# Altium PCB NEW_PCB.pcbdoc
Units mil, origin at the board's own origin, x right, y up, seen from the top; angles counter-clockwise.
Board outline 1948.8 x 1811 mil, 2 copper layers (Top Layer, Bottom Layer); 48 components, 54 nets, 170 pads, 44 vias.
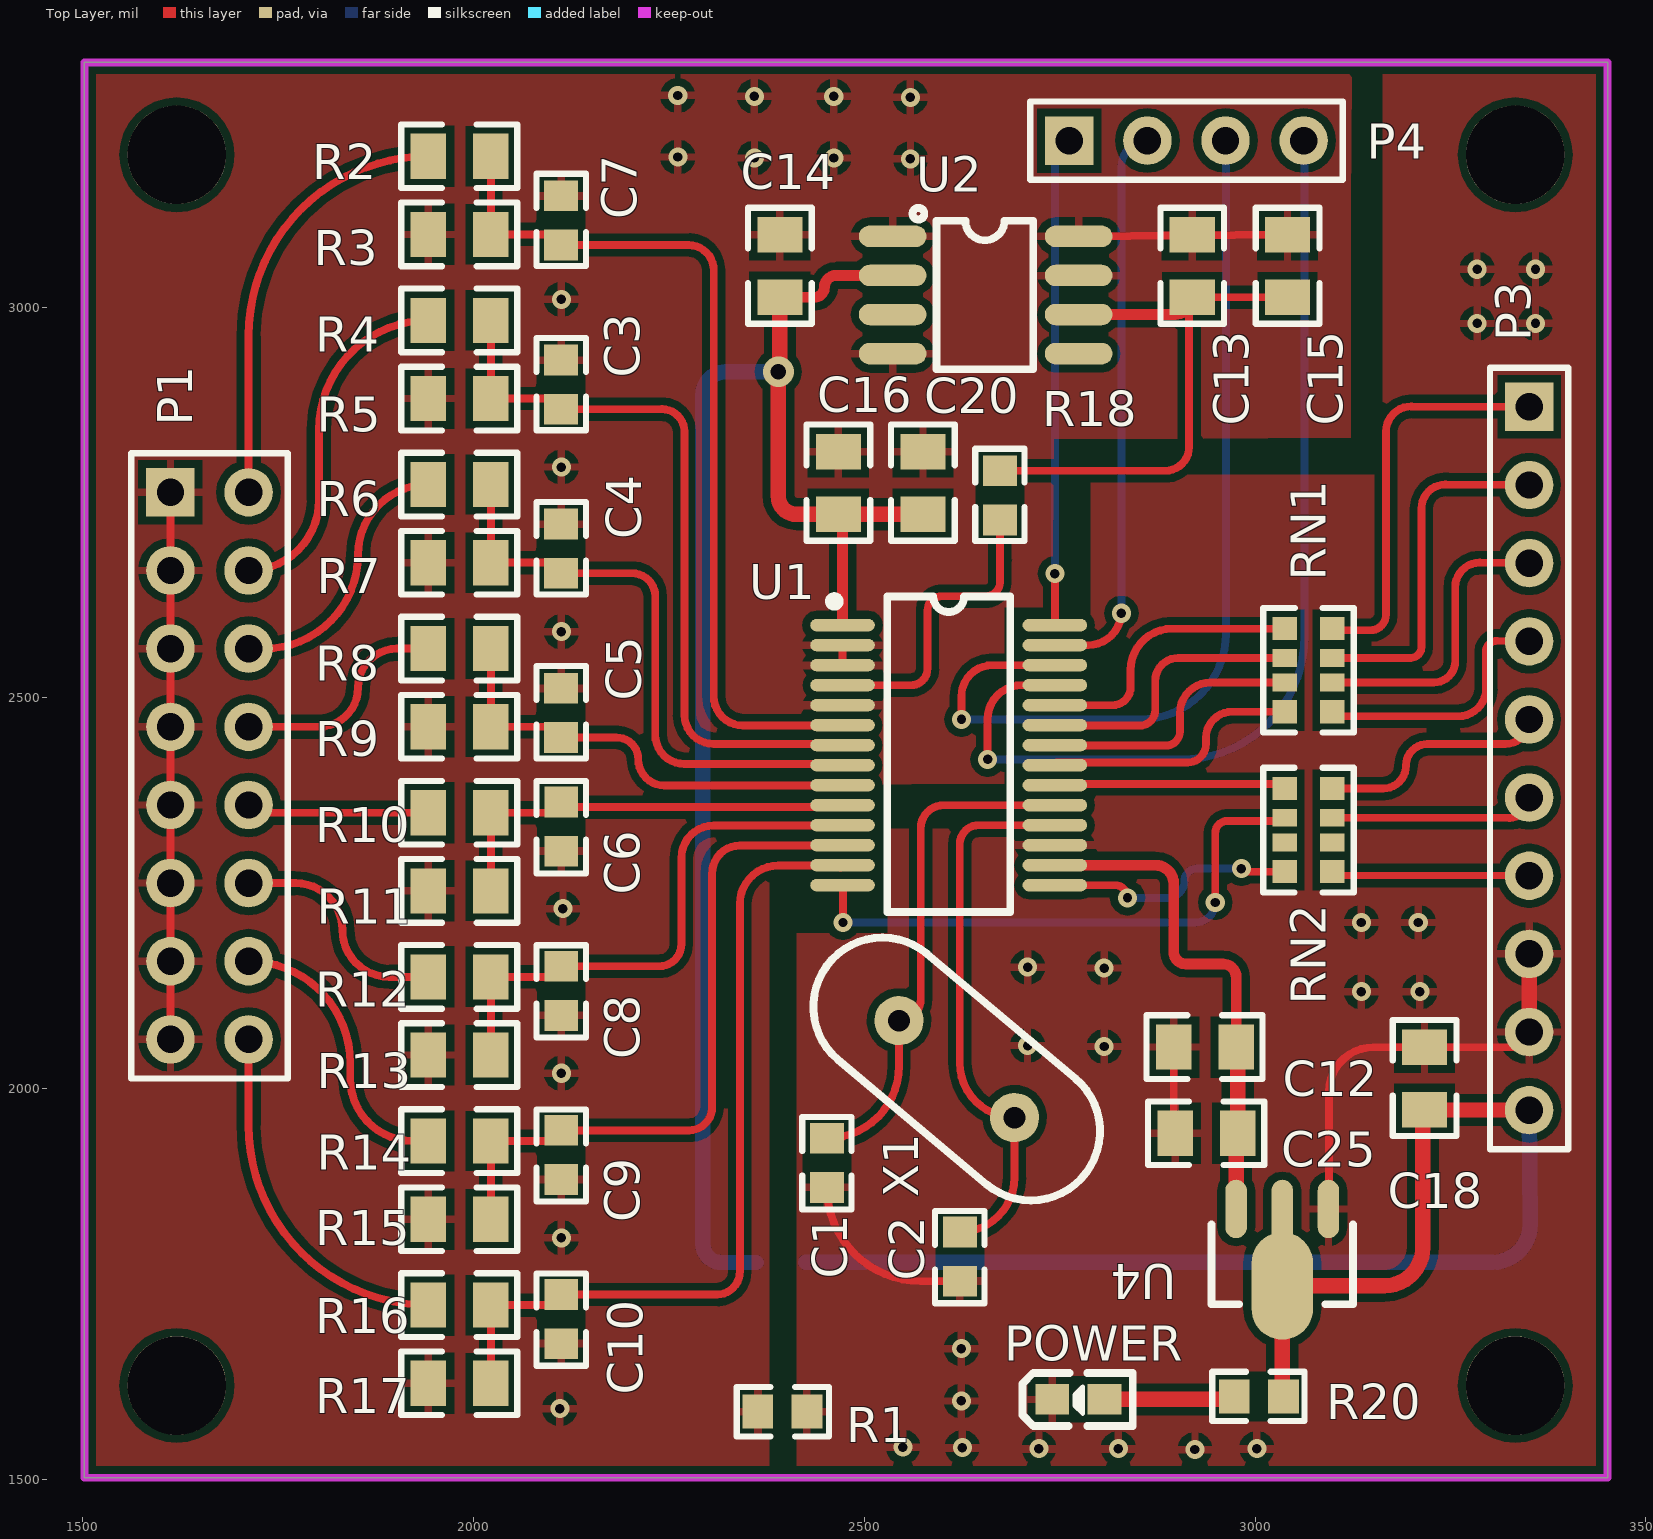
[diagram p0: Top Layer view]
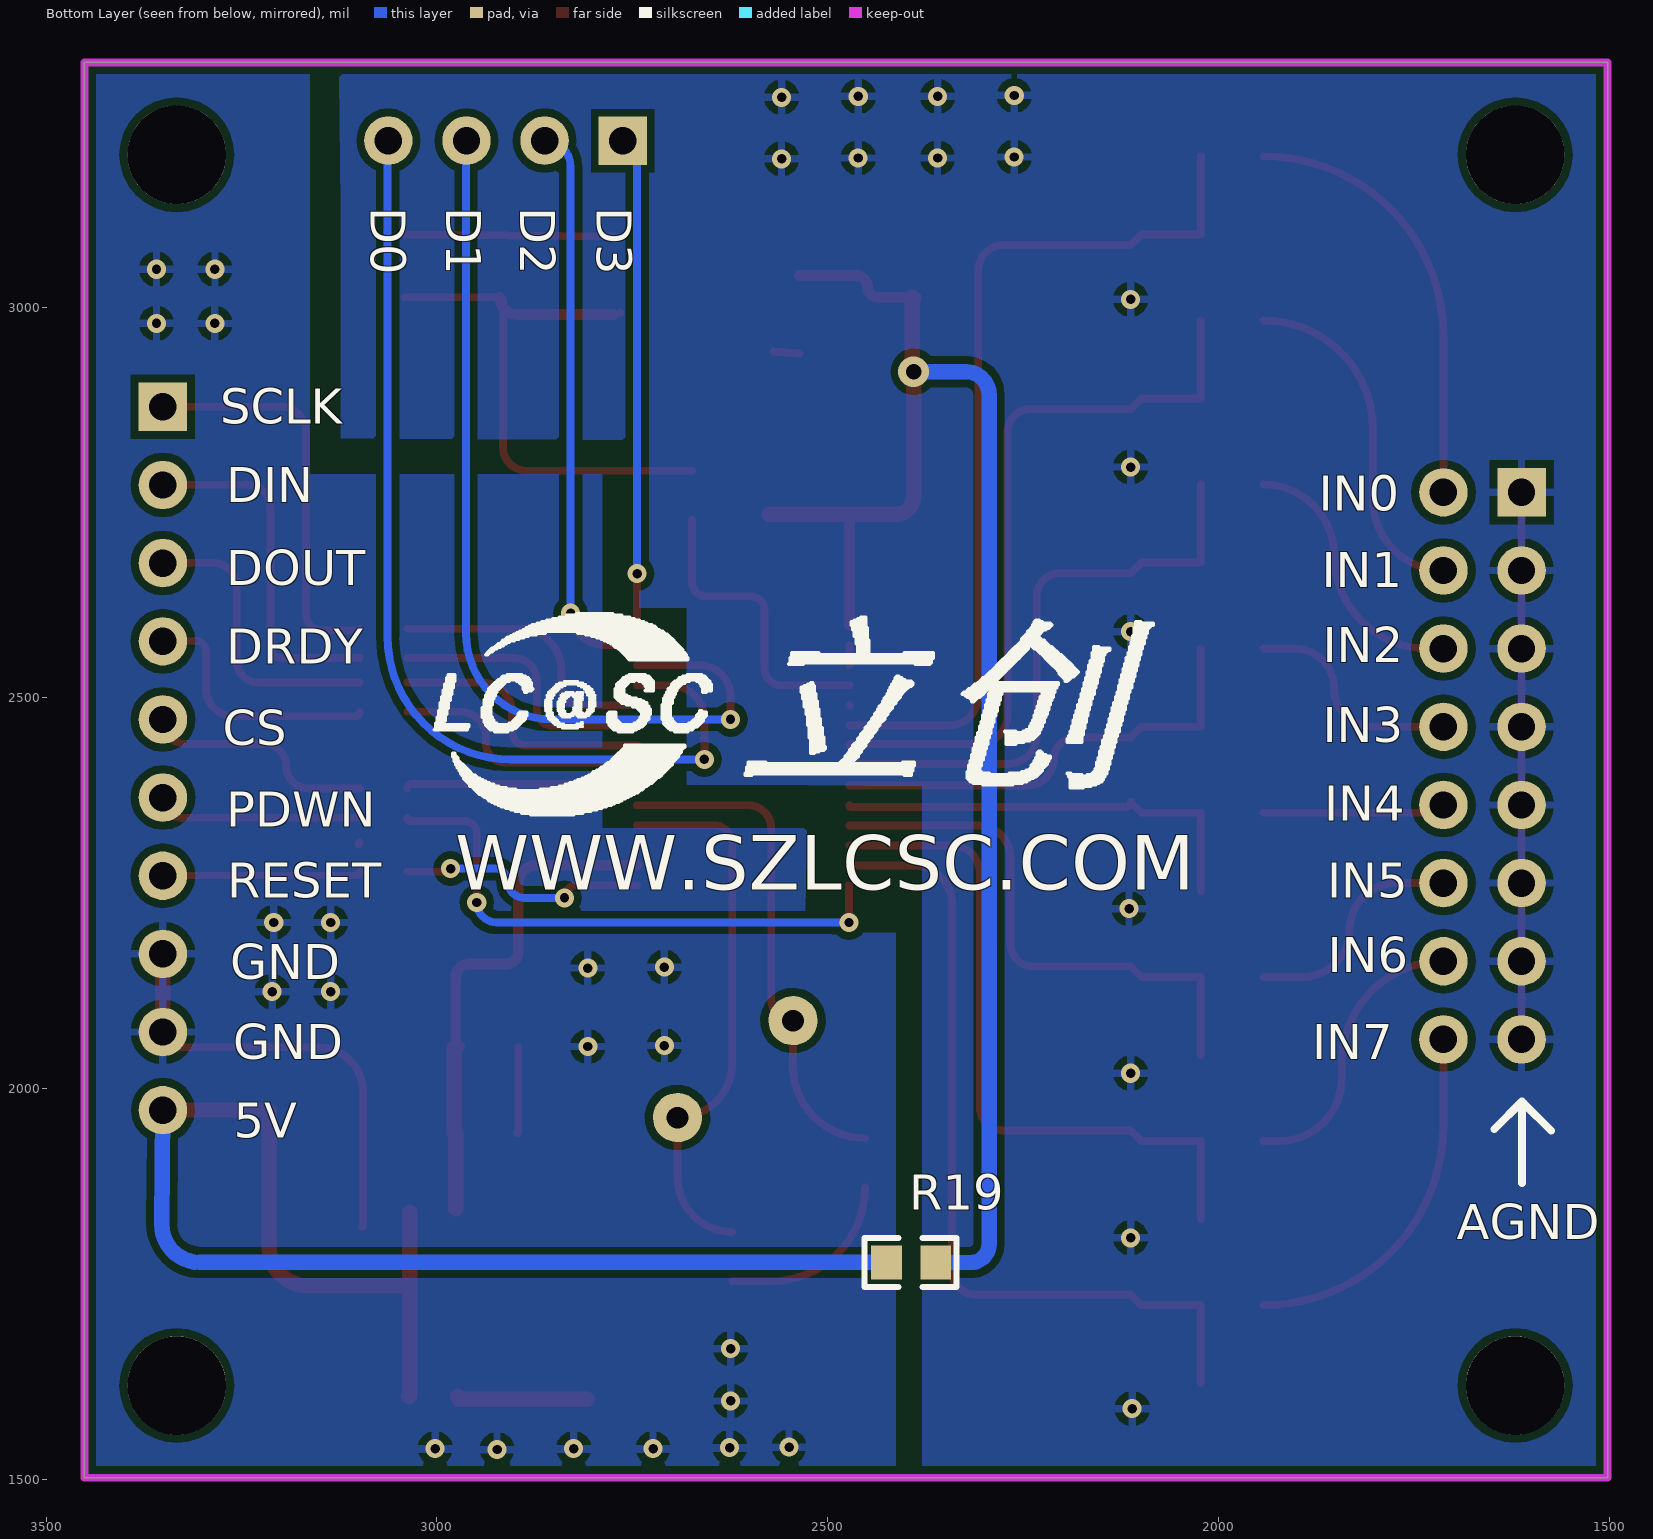
[diagram p1: Bottom Layer view, seen from below]

## Layer stack, top to bottom
Top Solder: solder mask 0.4, Solder Resist, Dk 3.5
Top Layer: signal copper 1.4
Dielectric1: dielectric 12.6, FR-4, Dk 4.8
Bottom Layer: signal copper 1.4
Bottom Solder: solder mask 0.4, Solder Resist, Dk 3.5

## Board outline
1502,1502 3450.8,1502 3450.8,3313 1502,3313

## Design rules (kind name [scope] priority, off if disabled: settings)
Clearance [All] p1: gap=10
PolygonConnect [All] p1: connectstyle=Relief reliefconductorwidth=10 reliefentries=4 polygonreliefangle="90 Angle" airgapwidth=10
RoutingVias [All] p1: holewidth=28 width=50 viastyle="Through Hole" minholewidth=28 minwidth=50 maxholewidth=28 maxwidth=50
SolderMaskExpansion [All] p1: expansion=4
Width [All] p1: maxlimit=10 minlimit=10 preferedwidth=10
30 further rules are at their usual default settings.

## Components (designator, comment, footprint, x,y, rotation, side; value= is the part's Value field where it differs from the comment)
C1 "18pF" ?#1 2452,1873 r90 top
C2 "18pF" ?#1 2622,1753 r90 top
C3 "1nF(102)" ?#1 2112,2933 r270 top
C4 "1nF(102)" ?#1 2112,2723 r270 top
C5 "1nF(102)" ?#1 2112,2513 r270 top
C6 "1nF(102)" ?#1 2112,2303 r90 top
C7 "1nF(102)" ?#1 2112,3143 r270 top
C8 "1nF(102)" ?#1 2112,2093 r90 top
C9 "1nF(102)" ?#1 2112,1883 r90 top
C10 "1nF(102)" ?#1 2112,1673 r90 top
C12 "4.7uF" ?#2 2895.7,2053.16 r0 top
C13 "100nF(104)" ?#2 2919.32,3092.53 r270 top
C14 "4.7uF" ?#2 2391.8,3092.5 r270 top
C15 "4.7uF" ?#2 3041.37,3092.53 r270 top
C16 "100nF(104)" ?#2 2466.65,2814.91 r270 top
C18 "4.7uF" ?#2 3216.6,2053.1 r270 top
C20 "22uF" ?#2 2574.83,2814.97 r270 top
C25 "100nF(104)" ?#2 2897.67,1942.92 r0 top
P1 "2*8Headers" ?#3 1612,2763 r270 top
P3 "Headers  Pins2.54mm1*10P" ?#4 3350.5,2472.39 r270 top
P4 "Headers  Pins 1*4P" ?#5 2862,3213 r0 top
POWER "0603 Green 509-620mcd" ?#6 2807.2,1602.31 r180 top
R1 "0Ω" ?#1 2427.2,1586.62 r180 top
R2 "100Ω" ?#2 1942,3193 r0 top
R3 "10KΩ" ?#2 1942,3093 r0 top
R4 "100Ω" ?#2 1942,2983 r0 top
R5 "10KΩ" ?#2 1942,2883 r0 top
R6 "100Ω" ?#2 1942,2773 r0 top
R7 "10KΩ" ?#2 1942,2673 r0 top
R8 "100Ω" ?#2 1942,2563 r0 top
R9 "10KΩ" ?#2 1942,2463 r0 top
R10 "100Ω" ?#2 1942,2353 r0 top
R11 "10KΩ" ?#2 1942,2253 r0 top
R12 "100Ω" ?#2 1942,2143 r0 top
R13 "10KΩ" ?#2 1942,2043 r0 top
R14 "100Ω" ?#2 1942,1933 r0 top
R15 "10KΩ" ?#2 1942,1833 r0 top
R16 "100Ω" ?#2 1942,1723 r0 top
R17 "10KΩ" ?#2 1942,1623 r0 top
R18 "0Ω" ?#7 2673.34,2791.29 r270 top
R19 "0Ω" ?#8 2425.3,1777.5 r0 bottom
R20 "1KΩ" ?#1 2972.55,1606.25 r0 top
RN1 "100Ω(100R)" ?#9 3098.53,2482.23 r270 top
RN2 "100Ω(100R)" ?#9 3098.45,2277.61 r270 top
U1 "ADS1256IDBR copy" ?#10 2471.97,2593.04 r0 top
U2 "REF5025AIDR" ?#11 2561.13,3090.5 r0 top
U4 "SE8533-HF" ?#12 3029.64,1746.01 r180 top
X1 "8MHz" ?#13 2692,1963 r50 top

## Footprints (in the part's own frame and the unit in brackets; to place one, negate y for a bottom-side part, rotate by r counter-clockwise, add the part's x,y. Pads: shape width x height; smd on the part's side, far side on the other; paste and mask are expansions set on the pad)
?#1 [mm]
  rect 1x1.1 smd: 1(0.015,-0.001) 2(1.615,-0.001)
  silkscreen extent -0.7,-0.8 2.3,0.8
?#2 [mm]
  rect 1.16x1.47 smd: 1(0,0) 2(2.032,0)
  silkscreen extent -0.88,-1.04 2.89,1.03
?#3 [mm]
  rect 1.575x1.575 hole 0.889: 1(0,0)
  round 1.575 hole 0.889: 2(0,2.54) 3(2.54,0) 4(2.54,2.54) 5(5.08,0) 6(5.08,2.54) 7(7.62,0) 8(7.62,2.54) 9(10.16,0) 10(10.16,2.54) 11(12.7,0) 12(12.7,2.54) 13(15.24,0) 14(15.24,2.54) 15(17.78,0) 16(17.78,2.54)
  silkscreen extent -1.27,-1.27 19.05,3.81
?#4 [mm]
  rect 1.575x1.575 hole 0.889: 1(-10.16,0)
  round 1.575 hole 0.889: 2(-7.62,0) 3(-5.08,0) 4(-2.54,0) 5(0,0) 6(2.54,0) 7(5.08,0) 8(7.62,0) 9(10.16,0) 10(12.7,0)
  silkscreen extent -11.43,-1.27 13.97,1.27
?#5 [mm]
  rect 1.575x1.575 hole 0.889: 1(-2.54,0)
  round 1.575 hole 0.889: 2(0,0) 3(2.54,0) 4(5.08,0)
  silkscreen extent -3.81,-1.27 6.35,1.27
?#6 [mm]
  rect 1.092x0.991 smd: 1(0,0) 2(1.702,0)
  silkscreen extent -0.91,-0.86 2.67,0.86
?#7 [mm]
  rect 1x1.1 smd: 1(0.015,0) 2(1.615,0)
  silkscreen extent -0.7,-0.8 2.3,0.8
?#8 [mm]
  rect 1x1.1 smd: 1(-0.015,0.001) 2(-1.615,0.001)
  silkscreen extent -2.3,-0.8 0.7,0.8
?#9 [mm]
  rect 0.75x0.8 smd: 1(-2.7,-1.539) 4(0,-1.539) 5(0,0) 8(-2.7,0)
  rect 0.58x0.8 smd: 2(-1.749,-1.539) 3(-0.949,-1.539) 6(-0.949,0) 7(-1.749,0)
  silkscreen extent -3.37,-2.24 0.67,0.7
?#10 [mm]
  oval 2.1x0.4 smd: 1(0,0) 2(0,-0.65) 3(0,-1.3) 4(0,-1.95) 5(0,-2.6) 6(0,-3.25) 7(0,-3.9) 8(0,-4.55) 9(0,-5.2) 10(0,-5.85) 11(0,-6.5) 12(0,-7.15) 13(0,-7.8) 14(0,-8.45) 15(6.9,-8.45) 16(6.9,-7.8) 17(6.9,-7.15) 18(6.9,-6.5) 19(6.9,-5.85) 20(6.9,-5.2) 21(6.9,-4.55) 22(6.9,-3.9) 23(6.9,-3.25) 24(6.9,-2.6) 25(6.9,-1.95) 26(6.9,-1.3) 27(6.9,-0.65) 28(6.9,0)
  silkscreen extent -0.42,-9.33 5.45,0.93
?#11 [mm]
  oval 2.2x0.7 smd: 1(-0.635,0) 2(-0.635,-1.27) 3(-0.635,-2.54) 4(-0.635,-3.81) 5(5.41,-3.81) 6(5.41,-2.54) 7(5.41,-1.27) 8(5.41,0)
  silkscreen extent 0.01,-4.32 3.94,0.93
?#12 [mm]
  oval 0.7x1.9 smd: 1(-1.628,-2.54) 3(1.374,-2.54)
  oval 2x3.5 smd: 2(-0.127,-0.041)
  oval 0.7x2.1 smd: 2(-0.127,-2.441)
  silkscreen extent -2.43,-2.04 2.17,0.56
?#13 [mm]
  round 1.6 hole 0.7: 1(0,4.9) 2(0,0)
  silkscreen extent -2.25,-2.94 2.25,7.84

## Free pads (board coordinates)
  round 125.98 hole 125.98 unplated: ""(1620.11,1620.09) ""(1620.11,3194.89) ""(3332.71,1620.09) ""(3332.71,3194.89)

## Via types
v1: diameter 24.41, hole 12.01, Top Layer to Bottom Layer, 37 vias
v2: diameter 24.4, hole 12, Top Layer to Bottom Layer, 6 vias
v3: diameter 39.37, hole 19.69, Top Layer to Bottom Layer, 1 vias

## Nets (pads, with @x,y where several pads share a name; then routed paths per layer and width w, separated by ;. In a path a pad name is that pad's centre, name@x,y a point inside that pad or via, vN(x,y) a via of type N, cw(c..) or ccw(c..) an arc to the next point about the centre after c; other vN are vias at no path point)
$BoardOutlineNet: 
ADS_XTAL1: C1.2 U1.19 X1.1 | length 653.5
  Top Layer w10: C1.2 ccw(c2452.01,2028.8) 2544.22,2028.8 X1.1 ccw(c2544.22,2114.79) 2572,2114.79 2572,2333 cw(c2601.68,2333) 2601.68,2362.68 U1.19@2743.7,2362.7
ADS_XTAL2: C2.2 U1.18 X1.2 | length 711.7
  Top Layer w10: C2.2 ccw(c2622.01,1886.58) 2692,1886.58 X1.2 cw(c2692,2033) 2622,2033 2622,2313 cw(c2646.09,2313) 2646.09,2337.09 U1.18@2743.7,2337.1
AGND: C3.1 C4.1 C5.1 C6.1 C7.1 C8.1 C9.1 C10.1 C13.1 C14.1 C15.1 C16.1 C20.1 P1.1 P1.3 P1.5 P1.7 P1.9 P1.11 P1.13 P1.15 R1.2 R3.1 R5.1 R7.1 R9.1 R11.1 R13.1 R15.1 R17.1 U1.2 U1.3 U1.5 U2.1 U2.4 U2.7 U2.8 | length 1026.9
  Top Layer w10: P1.15 P1.1 ; U1.5@2471.52,2490.17 ccw(c2471.52,2490.64) U1.5@2472,2490.64 ; U1.3@2472,2541.8 U1.2 ; U2.4 U2.4@2569,2943 ; U2.8 3040.9,3093 cw(c3040.88,3092.52) C15.1@3041.36,3092.52
  other v1: 2110.24,1590.57 2112.21,1809.08 2112.2,2019.71 2114.19,2230.33 2112.23,2584.66 2112.21,2795.3 2112.22,3009.85 2558.83,3189.63 2359.22,3190.8 2460.81,3190.83 2261.2,3192 2558.76,3268.43 2359.15,3269.59 2460.74,3269.63 2261.13,3270.79
AIN0: C7.2 R2.2 R3.2 U1.6 | length 1140.9
  Top Layer w10: R2.2 R3.2 2098.4,3093 C7.2 2275,3079.4 ; 2274.96,3079.41 cw(c2274.96,3047.25) 2307.12,3047.25 ; 2307.1,3047.3 2307.1,2541.3 2307.1,2502 ccw(c2344.52,2501.98) 2344.52,2464.58 2471.5,2464.6 ccw(c2471.52,2465.05) U1.6
AIN1: C3.2 R4.2 R5.2 U1.7 | length 956.5
  Top Layer w10: R4.2 R5.2 2098.4,2883 C3.2 2240.9,2869.4 ; 2240.86,2869.41 cw(c2240.86,2840.56) 2269.71,2840.56 ; 2269.72,2478.36 ccw(c2307.12,2478.36) 2307.12,2440.95 ; 2269.7,2478.4 2269.7,2515.8 2269.7,2840.6 ; 2307.1,2441 U1.7@2470.5,2441 ; U1.7@2470.5,2440.95 cw(c2470.5,2439.46) U1.7
AIN2: C4.2 R6.2 R7.2 U1.8 | length 771.8
  Top Layer w10: R6.2 R7.2 2098.4,2673 C4.2 2202.8,2659.4 ; 2202.83,2659.41 cw(c2202.83,2629.93) 2232.31,2629.93 ; 2232.31,2452.76 ccw(c2269.72,2452.76) 2269.72,2415.36 ; 2232.3,2452.8 2232.3,2629.9 ; 2269.7,2415.4 U1.8@2470.5,2415.4 ; U1.8@2470.49,2415.36 cw(c2470.49,2413.86) U1.8
AIN3: C5.2 R8.2 R9.2 U1.9 | length 591
  Top Layer w10: R8.2 R9.2 2098.4,2463 C5.2 2182.5,2449.4 cw(c2182.52,2421.27) 2210.66,2421.27 ccw(c2244.12,2421.27) 2244.12,2387.8 2263.8,2387.8 U1.9@2471.5,2387.8 ; U1.9@2471.53,2387.81 ccw(c2471.53,2388.27) U1.9
AIN4: C6.2 R10.2 R11.2 U1.10 | length 560.6
  Top Layer w10: R11.2 R10.2 2098.4,2353 C6.2 ccw(c2118.35,2366.59) C6.2@2118.35,2360.25 ; C6.2@2118.4,2360.2 2169.3,2360.2 2218.5,2360.2 U1.10@2469.6,2360.2 ; U1.10@2469.56,2360.25 ccw(c2469.56,2362.68) U1.10
AIN5: C8.2 R12.2 R13.2 U1.11 | length 706
  Top Layer w10: R13.2 R12.2 2098.4,2143 C8.2 2237.3,2156.6 ccw(c2237.32,2185.05) 2265.78,2185.05 ; 2265.8,2185 2265.8,2226.4 2265.8,2295.3 cw(c2307.12,2295.28) 2307.12,2336.62 U1.11@2471.5,2336.6 ; U1.11@2471.53,2336.62 ccw(c2471.53,2337.09) U1.11
AIN6: C9.2 R14.2 R15.2 U1.12 | length 892.3
  Top Layer w10: R15.2 R14.2 2098.4,1933 C9.2 2275.4,1946.6 ; 2275.35,1946.59 ccw(c2275.35,1976.39) 2305.15,1976.39 ; 2305.1,1976.4 2305.1,2129.9 2305.1,2275.6 ; 2305.15,2275.6 cw(c2340.58,2275.6) 2340.58,2311.03 ; 2340.6,2311 U1.12@2471.5,2311 ; U1.12@2471.53,2311.03 ccw(c2471.53,2311.5) U1.12
AIN7: C10.2 R16.2 R17.2 U1.13 | length 1075.6
  Top Layer w10: R17.2 R16.2 2098.4,1723 C10.2 2311.4,1736.6 ccw(c2311.41,1765.76) 2340.58,1765.76 ; 2340.6,1765.8 2340.6,2236.2 ; 2340.58,2236.23 cw(c2389.79,2236.23) 2389.79,2285.44 ; 2389.8,2285.4 U1.13@2471.5,2285.4 ; U1.13@2469.09,2283 ccw(c2469.09,2285.91) 2472,2285.91 cw(c2471.53,2285.91) U1.13@2471.53,2285.44
AVDD_5V: C14.2 C16.2 C20.2 R19.2 U1.1 U2.2 | length 2053.2
  Top Layer w13.78: C14.2 2435.7,3012.5 ; 2435.74,3012.49 ccw(c2435.74,3025.6) 2448.85,3025.6 cw(c2463.75,3025.6) 2463.75,3040.5 ; 2463.7,3040.5 U2.2 ; U1.1 C16.2@2472,2729.6
  Top Layer w19.68: v3@2389.79,2909.46 ccw(c2381.92,2909.46) 2381.92,2917.33 ccw(c2381.92,2927.2) 2391.79,2927.2 C14.2 ; v3@2389.8,2909.5 2389.8,2757.9 ccw(c2412.78,2757.88) 2412.78,2734.9 C16.2 C20.2@2574.8,2734.9 ; C14.2@2389.79,3010.56 cw(c2391.75,3010.56) C14.2 ; C16.2 cw(c2466.64,2729.57) C16.2@2471.97,2729.57 ; C20.2@2574.76,2734.9 ccw(c2574.76,2734.96) C20.2
  Bottom Layer w19.68: 2293.3,1801.1 2293.3,1818.9 2293.3,2809.1 2293.3,2887.8 ; 2293.34,1801.05 ccw(c2316.89,1801.05) 2316.89,1777.5 R19.2@2361.7,1777.5 ; 2293.34,2887.8 cw(c2322.86,2887.8) 2322.86,2917.33 ; 2322.9,2917.3 v3(2389.87,2917.27)
CS: RN2.1 U1.20 | length 298.3
  Top Layer w10: U1.20@2743.66,2388.27 cw(c2745.16,2388.27) U1.20@2745.16,2389.77 ; U1.20@2745.2,2389.8 2986.2,2389.8 RN2.1@3031.9,2389.8 ; RN2.1@3031.93,2389.77 cw(c3031.93,2383.87) RN2.1@3037.83,2383.87
D0: P4.4 U1.25 | length 1292.7
  Top Layer w10: 2657.51,2472.45 cw(c2701.29,2472.45) 2701.29,2516.23 ; 2657.5,2472.5 v2(2657.59,2421.21) ; 2701.3,2516.2 U1.25@2743.7,2516.2
  Bottom Layer w10: v2(2657.59,2421.21) 2905.5,2421.2 ccw(c2905.48,2578.75) 3063.02,2578.75 ; P4.4 cw(c3062,3211.98) 3063.02,3211.98 3063,2578.7
D1: P4.3 U1.26 | length 1204.1
  Top Layer w10: 2624,2502 v2(2624.12,2472.39) ; 2624.05,2501.98 cw(c2663.89,2501.98) 2663.89,2541.82 U1.26@2743.7,2541.8
  Bottom Layer w10: v2(2624.12,2472.39) 2852.3,2472.4 ; 2852.33,2472.39 ccw(c2852.33,2582.69) 2962.63,2582.69 ; P4.3 cw(c2962,3212.37) P4.3@2962.63,3212.37 ; 2962.6,2582.7 P4.3@2962.6,3212.4
D2: P4.2 U1.27 | length 767.6
  Top Layer w10: U1.27@2778.1,2567.4 2743.7,2567.4 2785.9,2567.4 ; 2785.93,2567.41 ccw(c2785.93,2610.24) v2@2828.77,2610.24
  Bottom Layer w10: 2828.77,3179.77 cw(c2862,3179.77) P4.2 ; v2(2828.77,2608.28) 2828.8,3179.8
D3: P4.1 U1.28 | length 661.2
  Top Layer w10: U1.28@2743.7,2593 v2(2743.66,2658.99)
  Bottom Layer w10: P4.1@2743.66,3194.66 cw(c2762,3194.66) P4.1 cw(c2762,3193.47) P4.1@2781.53,3193.47 ; v2(2743.66,2658.99) P4.1@2743.7,3194.7
DGND: C1.1 C2.1 C12.1 C18.1 C25.1 P3.8 P3.9 POWER.2 R1.1 U1.17 U4.1 | length 929
  Top Layer w10: C1.1 ccw(c2572.01,1873.61) 2572.01,1753.61 C2.1 ; U1.17@2741.22,2309.07 ccw(c2741.22,2311.5) U1.17@2743.66,2311.5 ; C12.1@2895.7,2053.1 2895.7,1944.9 ccw(c2897.68,1944.88) C25.1@2897.68,1942.91 ; 3094.52,1996.07 cw(c3151.43,1996.07) 3151.43,2052.99 ; 3094.5,1996.1 3094.5,1824.6 ccw(c3096.1,1824.58) U4.1@3096.1,1823 ; 3151.4,2053 C18.1 3332,2053 ccw(c3331.99,2073) P3.9@3352,2073
  Top Layer w19.68: P3.9 P3.8
  other v1: 2922.86,1538.18 2723.25,1539.34 2824.83,1539.38 3002.08,1539.32 2549.24,1541.35 2625.22,1540.54 2624.05,1600.4 2624.05,1667.33 2806.77,2053.88 2708.75,2055.08 3135.82,2124.04 3210.62,2124.05 2806.78,2154.27 2708.76,2155.47 3135.83,2212.62 3208.66,2212.63 3283.92,2979.12 3358.71,2979.13 3283.9,3048.46 3358.7,3048.46
DIN: RN1.2 U1.23 | length 360.1
  Top Layer w10: U1.23@2743.66,2465.05 ccw(c2744.13,2465.05) U1.23@2744.13,2464.58 ; U1.23@2744.1,2464.6 2852.4,2464.6 ccw(c2852.39,2484.26) 2872.08,2484.26 ; 2872.1,2484.3 2872.1,2521.7 ; 2872.08,2521.66 cw(c2901.55,2521.66) 2901.55,2551.13 ; 2901.5,2551.1 RN1.2@3037.9,2551.1
DOUT: RN1.3 U1.22 | length 350.7
  Top Layer w10: U1.22@2743.66,2439.46 ccw(c2744.13,2439.46) U1.22@2744.13,2438.99 ; U1.22@2744.1,2439 2885.9,2439 ; 2885.86,2438.99 ccw(c2885.86,2456.7) 2903.57,2456.7 ; 2903.57,2480.32 cw(c2942.88,2480.32) 2942.88,2519.63 ; 2903.6,2456.7 2903.6,2480.3 ; 2942.9,2519.6 RN1.3@3037.9,2519.6
DRDY: RN1.4 U1.21 | length 336.6
  Top Layer w10: U1.21@2743.66,2413.86 cw(c2747.13,2413.86) U1.21@2747.13,2417.33 ; U1.21@2747.1,2417.3 2913.4,2417.3 ; 2913.41,2417.33 ccw(c2913.41,2440.95) 2937.04,2440.95 ; 2937,2441 2937,2448.8 ; 2937.04,2448.83 cw(c2970.44,2448.83) 2970.44,2482.23 ; 2970.4,2482.2 RN1.4@3037.9,2482.2
DVDD_3V3: C12.2 C25.2 U1.16 U4.3 | length 652.4
  Top Layer w13.78: U1.16@2743.7,2285.9 2872.2,2285.9 cw(c2872.22,2262.43) 2895.7,2262.43 ; 2895.7,2262.4 2895.7,2175.2 ccw(c2911.45,2175.21) 2911.45,2159.46 ; 2911.4,2159.5 2935.1,2159.5 2958.7,2159.5 ; 2958.69,2159.46 cw(c2958.69,2142.44) 2975.71,2142.44 ; C12.2@2975.7,2053.1 2975.7,2142.4
  Top Layer w19.68: C12.2@2974.28,2054.57 ccw(c2975.71,2054.57) C12.2 cw(c2975.71,2051.18) 2977.68,2051.18 2977.7,1942.9 ccw(c2977.68,1940.74) C25.2@2975.5,1940.74 ; U4.3 C25.2@2975.5,1940.7
IN0: P1.2 R2.1 | length 561.3
  Top Layer w10: P1.2 1712,2963 cw(c1942.01,2962.98) R2.1
IN1: P1.4 R4.1 | length 451.3
  Top Layer w10: P1.4 ccw(c1712,2753) 1802,2753 1802,2763 1802,2843 cw(c1942.01,2842.98) R4.1
IN2: P1.6 R6.1 | length 349.9
  Top Layer w10: P1.6 1732,2563 ccw(c1732,2683) 1852,2683 cw(c1941.99,2683) R6.1
IN3: P1.8 R8.1 | length 287.1
  Top Layer w10: P1.8 1802,2463 ccw(c1802,2513) 1852,2513 cw(c1901.99,2513) 1901.99,2562.99 R8.1
IN4: P1.10 R10.1 | length 235.7
  Top Layer w10: P1.10 ccw(c1722.01,2363) 1722.01,2352.99 R10.1
IN5: P1.12 R12.1 | length 298.5
  Top Layer w10: P1.12 1772,2263 cw(c1772,2203) 1832,2203 ccw(c1892.01,2203) 1892.01,2142.99 R12.1
IN6: P1.14 R14.1 | length 369.9
  Top Layer w10: P1.14 cw(c1712,2033) 1842,2033 1842,2013 ccw(c1922.01,2013) 1922.01,1932.99 R14.1
IN7: P1.16 R16.1 | length 471.3
  Top Layer w10: P1.16 1712,1953 ccw(c1942.01,1953) R16.1
PDWN: RN2.2 U1.14 | length 727.8
  Top Layer w10: U1.14@2472,2260.32 cw(c2472,2259.85) U1.14@2472.47,2259.85 ; U1.14@2472.5,2259.8 v2(2472.55,2212.55) ; 2948.8,2326.8 v2@2948.9,2238.2 ; 2948.85,2326.78 cw(c2964.6,2326.78) 2964.6,2342.53 ; 2964.6,2342.5 RN2.2@3033.8,2342.5 ; RN2.2@3033.84,2342.53 ccw(c3033.84,2346.51) RN2.2
  Bottom Layer w10: v2@2472.6,2212.5 2494.1,2212.5 ; 2494.06,2212.55 ccw(c2494.06,2212.61) 2494.12,2212.61 2509.9,2212.6 2913.4,2212.6 2923.3,2212.6 ; 2923.26,2212.61 ccw(c2923.26,2238.2) v2(2948.85,2238.2) ; v2(2948.85,2238.2) v2@2948.9,2238.2
R20_1: POWER.1 R20.1 | length 168.2
  Top Layer w19.68: POWER.1 2969.23,1602.31 ccw(c2969.23,1606.24) R20.1
RESET: RN2.4 U1.15 | length 336.4
  Top Layer w10: U1.15@2743.66,2260.32 ccw(c2744.13,2260.32) U1.15@2744.13,2259.85 ; U1.15@2743.7,2260.3 2815.6,2260.3 ; 2813,2260.3 2820.4,2260.3 ; 2820.43,2260.32 cw(c2820.43,2244.1) v1(2836.64,2244.1) ; RN2.4 v1@2986.2,2277.6 ; v1@2986.2,2277.61 cw(c2986.2,2281.51) v1(2982.31,2281.51) ccw(c2986.2,2281.51) v1@2986.2,2277.61
  Bottom Layer w10: v1(2836.64,2244.1) 2883.9,2244.1 2887.8,2244.1 ccw(c2887.82,2265.76) 2909.48,2265.76 cw(c2925.23,2265.76) 2925.23,2281.51 ; 2925.2,2281.5 v1(2982.31,2281.51)
RN1_5: P3.4 RN1.5 | length 330.8
  Top Layer w10: RN1.5@3098.54,2482.23 ccw(c3104.38,2482.23) 3104.38,2476.39 3259.9,2476.4 ; 3259.87,2476.39 ccw(c3259.87,2511.82) 3295.3,2511.82 3295.3,2559.1 ; 3295.3,2559.07 cw(c3309.24,2559.07) 3309.24,2573 ; 3309.2,2573 P3.4
RN1_6: P3.3 RN1.6 | length 380
  Top Layer w10: RN1.6@3098.54,2519.63 cw(c3098.6,2519.63) 3098.6,2519.69 3228.4,2519.7 ccw(c3228.38,2547.25) 3255.93,2547.25 ; 3255.9,2547.3 3255.9,2631.9 3255.9,2641.7 ; 3255.93,2641.74 cw(c3287.19,2641.74) 3287.19,2673 P3.3
RN1_7: P3.2 RN1.7 | length 454.5
  Top Layer w10: RN1.7@3098.54,2551.13 cw(c3098.6,2551.13) 3098.6,2551.19 3198.8,2551.2 ; 3198.85,2551.19 ccw(c3198.85,2564.97) 3212.63,2564.97 ; 3212.6,2565 3212.6,2742.1 ; 3212.63,2742.14 cw(c3243.49,2742.14) 3243.49,2773 P3.2
RN1_8: P3.1 RN1.8 | length 517.2
  Top Layer w10: RN1.8@3098.54,2588.53 ccw(c3100.45,2588.53) RN1.8@3100.45,2586.62 ; RN1.8@3100.4,2586.6 3147.7,2586.6 ; 3147.67,2586.62 ccw(c3147.67,2606.31) 3167.35,2606.31 ; 3167.35,2840.56 cw(c3199.79,2840.56) 3199.79,2873 P3.1 ; 3167.4,2606.3 3167.4,2665.4 3167.4,2840.6
RN2_3: RN2.3
RN2_5: P3.7 RN2.5 | length 279.5
  Top Layer w10: RN2.5@3103.1,2273 P3.7 ; P3.7@3340.82,2261.82 ccw(c3340.82,2273) P3.7@3352,2273 ; RN2.5@3098.46,2277.61 ccw(c3103.07,2277.61) 3103.07,2273 cw(c3103.07,2277.61) RN2.5@3098.46,2277.61
RN2_6: RN2.6 | length 3.1
  Top Layer w10: RN2.6@3098.46,2314.97 ccw(c3100.43,2314.97) RN2.6@3100.43,2313
RN2_7: P3.6 RN2.7 | length 268.7
  Top Layer w10: RN2.7@3098.5,2346.5 3212.6,2346.5 3325.5,2346.5 ; 3325.47,2346.47 ccw(c3325.47,2373) P3.6@3352,2373
RN2_8: P3.5 RN2.8 | length 304.4
  Top Layer w10: RN2.8@3098.5,2383.9 3163.4,2383.9 ; 3163.41,2383.87 ccw(c3163.41,2413.39) 3192.94,2413.39 cw(c3220.5,2413.39) 3220.5,2440.95 ; 3220.5,2441 3287.4,2441 3320,2441 ; 3319.95,2440.95 ccw(c3319.95,2473) P3.5@3352,2473
S$67: 
S$69: 
S$1358: 
S$1360: 
S$1362: 
SCLK: RN1.1 U1.24 | length 359.3
  Top Layer w10: U1.24@2743.7,2490.6 2817.4,2490.6 ; 2817.43,2490.64 ccw(c2817.43,2513.79) 2840.58,2513.79 2840.6,2535.4 ; 2840.58,2535.44 cw(c2893.67,2535.44) 2893.67,2588.53 ; 2893.7,2588.5 RN1.1@3037.9,2588.5
U2_3: U2.3
U2_5: U2.5
U2_6: C13.2 C15.2 R18.1 U2.6 | length 734.6
  Top Layer w10: R18.1@2673.26,2790.75 ccw(c2673.33,2790.75) R18.1@2673.33,2790.68 ; R18.1@2673.3,2790.7 2885.2,2790.7 ccw(c2885.19,2820.88) 2915.38,2820.88 2915.4,3008.6 cw(c2919.31,3008.59) 2919.31,3012.52 C15.2@3041.4,3012.5 ; U2.6@2765,2993 ccw(c2765.87,2993) U2.6@2765.87,2992.13
  Top Layer w13.78: U2.6 2897.3,2990.5 ccw(c2897.29,3012.52) C13.2@2919.31,3012.52
U4_2: C18.2 P3.10 R19.1 R20.2 U4.2 | length 1857.2
  Top Layer w19.68: U4.2@3034.6,1842.1 3034.6,1747.6 3165,1747.6 ; U4.2@3034.64,1747.61 3034.64,1607.74 ccw(c3036.14,1607.74) R20.2 ; 3164.95,1747.61 ccw(c3164.95,1797.26) 3214.59,1797.26 ; 3214.6,1797.3 3214.6,1971.1 cw(c3216.59,1971.1) C18.2 P3.10
  Bottom Layer w19.68: R19.1@2424.69,1777.49 cw(c2424.77,1777.49) R19.1@2424.77,1777.57 ; R19.1@2424.8,1777.6 3303.2,1777.6 ; 3303.18,1777.57 ccw(c3303.18,1826.39) 3352,1826.39 P3.10
VREF2.5: R18.2 U1.4 | length 393.1
  Top Layer w10: U1.4@2472,2516.2 2559.6,2516.2 ; 2559.56,2516.23 ccw(c2559.56,2537.41) 2580.74,2537.41 ; 2580.7,2537.4 2580.7,2561 2580.7,2584.7 ; 2580.7,2580.1 2580.7,2612.2 ; 2580.74,2612.21 cw(c2598.45,2612.21) 2598.45,2629.93 ; 2598.5,2629.9 2614.2,2629.9 2655.5,2629.9 ; 2655.54,2629.93 ccw(c2655.54,2647.65) 2673.26,2647.65 ; 2673.26,2677.17 cw(c2673.33,2677.17) 2673.33,2677.24 ; 2673.3,2647.6 2673.3,2677.2 R18.2@2673.3,2727.7

## Polygon pours and split planes (outlines as drawn)
DGND on Bottom Layer "Bottom Layer-DGND" (solid, pour order 2): 3162.6,3311.8 3162.6,2786.2 2788.6,2786.2 2788.6,2333.4 2526.8,2333.4 2528.8,2199.6 2412.7,2199.6 2412.7,1618.9 2412.7,1500.8 3448.1,1504.7 3450,3311.8
AGND on Bottom Layer "Bottom Layer-AGND" (solid, pour order 0): 1502.9,3312.2 2705.6,3312.2 3124.9,3312.2 3122.9,3129.1 3122.9,2977.5 3122.9,2831.9 3099.3,2831.9 2921.3,2830.7 2743,2829.9 2741,2615.3 2680,2615.3 2680,2495.3 2680,2389 2597.3,2389 2378.8,2387 2378.8,1501.2 1500.9,1503.1
DGND on Top Layer "Top Layer-DGND" (solid, pour order 6): 3163.4,3311 3163.4,2785.4 2789.4,2785.4 2789.4,2332.7 2527.6,2332.7 2529.6,2198.8 2413.4,2198.8 2413.4,1618.1 2413.4,1500 3448.8,1503.9 3450.8,3311
AGND on Top Layer "Top Layer-AGND" (solid, pour order 4): 1502,3313 2704.8,3313 3124,3313 3122.1,3129.9 3122.1,2978.4 3122.1,2832.7 3098.5,2832.7 2742.2,2830.7 2740.2,2616.2 2679.2,2616.2 2679.2,2496.1 2679.2,2389.8 2596.5,2389.8 2378,2387.8 2378,1502 1500,1503.9

## Silkscreen, mask and mechanical layers (free items; w line width, h text height)
Bottom Overlay:
  drawing of 904 lines, arcs and shapes, not listed
  text "D3" at 2795.11,3127.96 h45 r90
  text "D2" at 2893.53,3127.96 h45 r90
  text "D1" at 2988.01,3127.96 h45 r90
  text "D0" at 3084.48,3127.96 h45 r90
  text "SCLK" at 3277,2850.58 h45
  text "DIN" at 3269.36,2750.18 h45
  text "IN0" at 1871.29,2739.7 h45
  text "DOUT" at 3269.38,2643.92 h45
  text "IN1" at 1867.35,2641.28 h45
  text "IN2" at 1866.59,2545.86 h45
  text "DRDY" at 3269.38,2543.52 h45
  text "IN3" at 1866.59,2443.51 h45
  text "CS" at 3273.64,2439.19 h45
  text "IN4" at 1864.57,2342.85 h45
  text "PDWN" at 3269.71,2334.89 h45
  text "WWW.SZLCSC.COM" at 2976.4,2254.78 h70
  text "IN5" at 1860.63,2244.43 h45
  text "RESET" at 3267.94,2244.35 h45
  text "IN6" at 1859.87,2149.02 h45
  text "GND" at 3264.56,2140.01 h45
  text "IN7" at 1879.58,2037.61 h45
  text "GND" at 3260.69,2037.62 h45
  text "5V" at 3259.96,1937.19 h45
  text "AGND" at 1694.68,1807.3 h45